# Altium PCB COMSXXXX_Comms_Board_Miniaturization.PcbDoc
Units mm, origin at the board's own origin, x right, y up, seen from the top; angles counter-clockwise.
Board outline 70 x 50 mm, 4 copper layers (Top, VCC, GND, Bottom); 55 components, 87 nets, 274 pads, 157 vias.
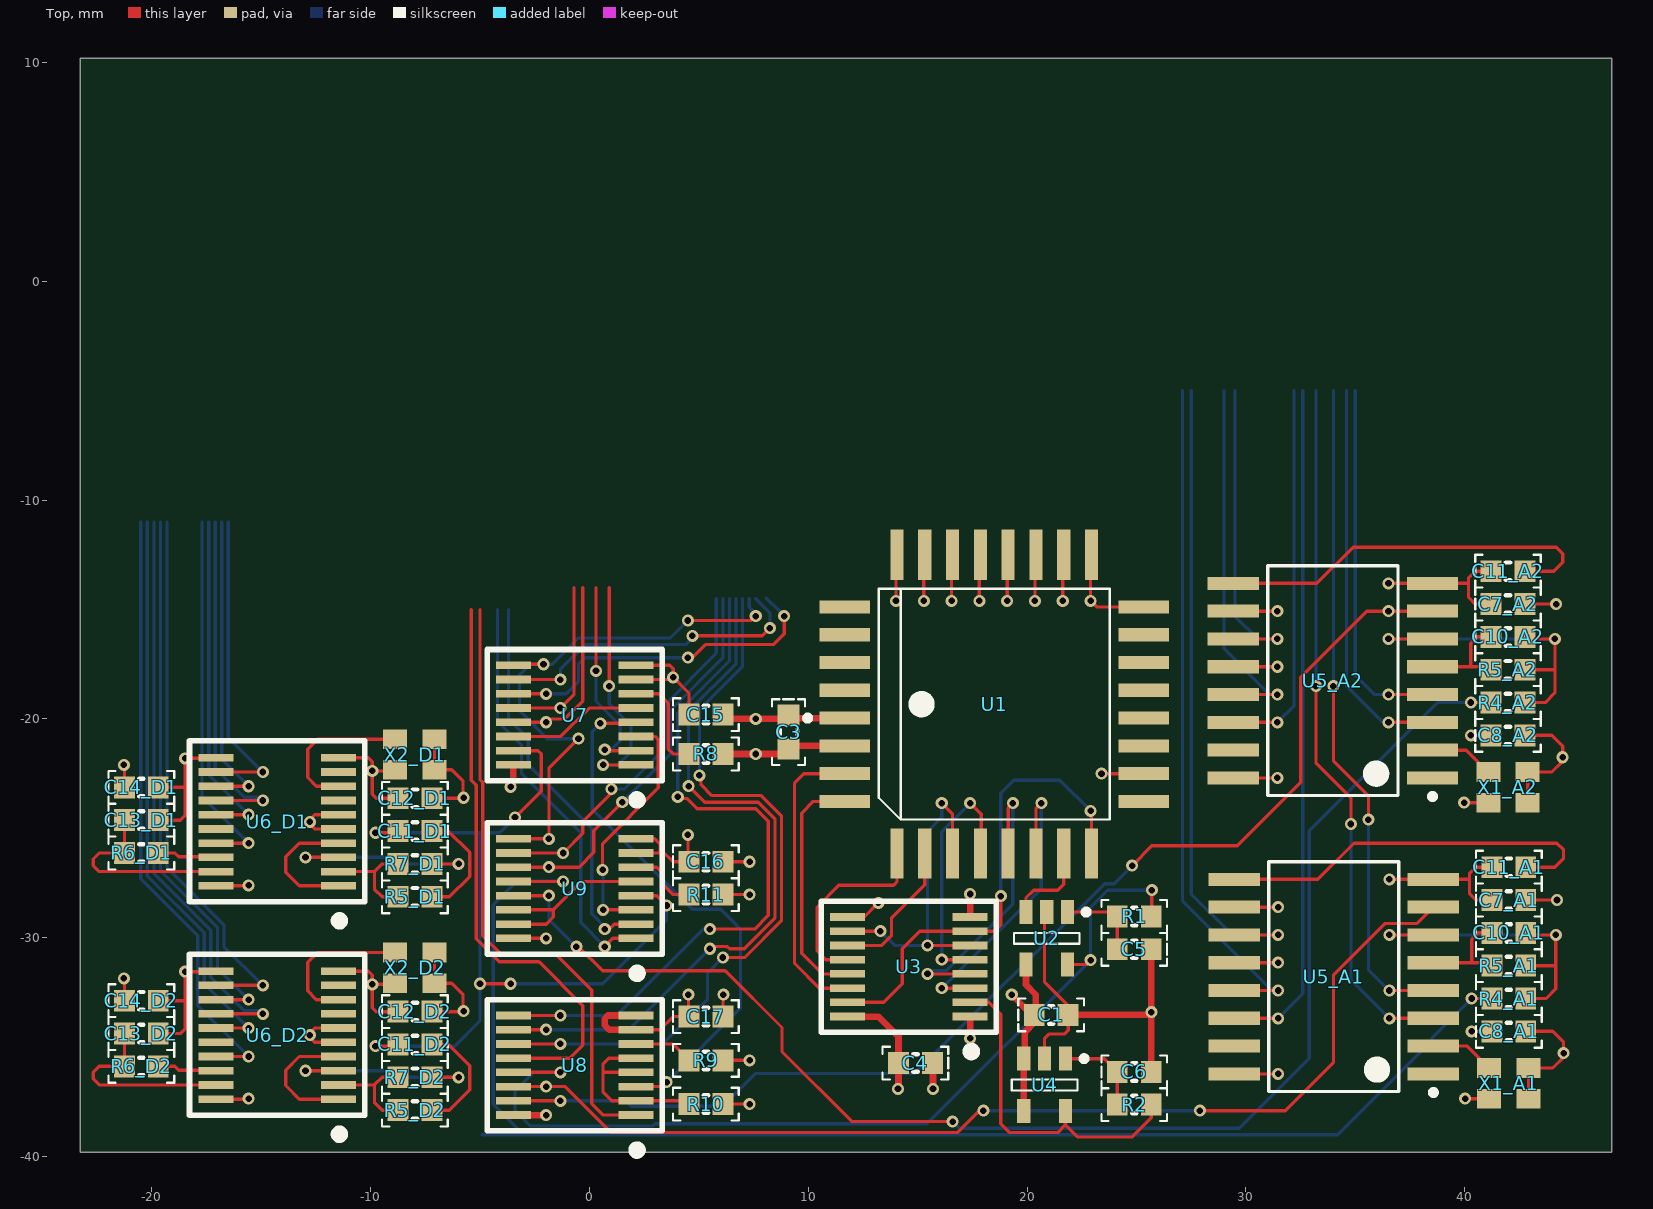
[diagram p0: Top view]
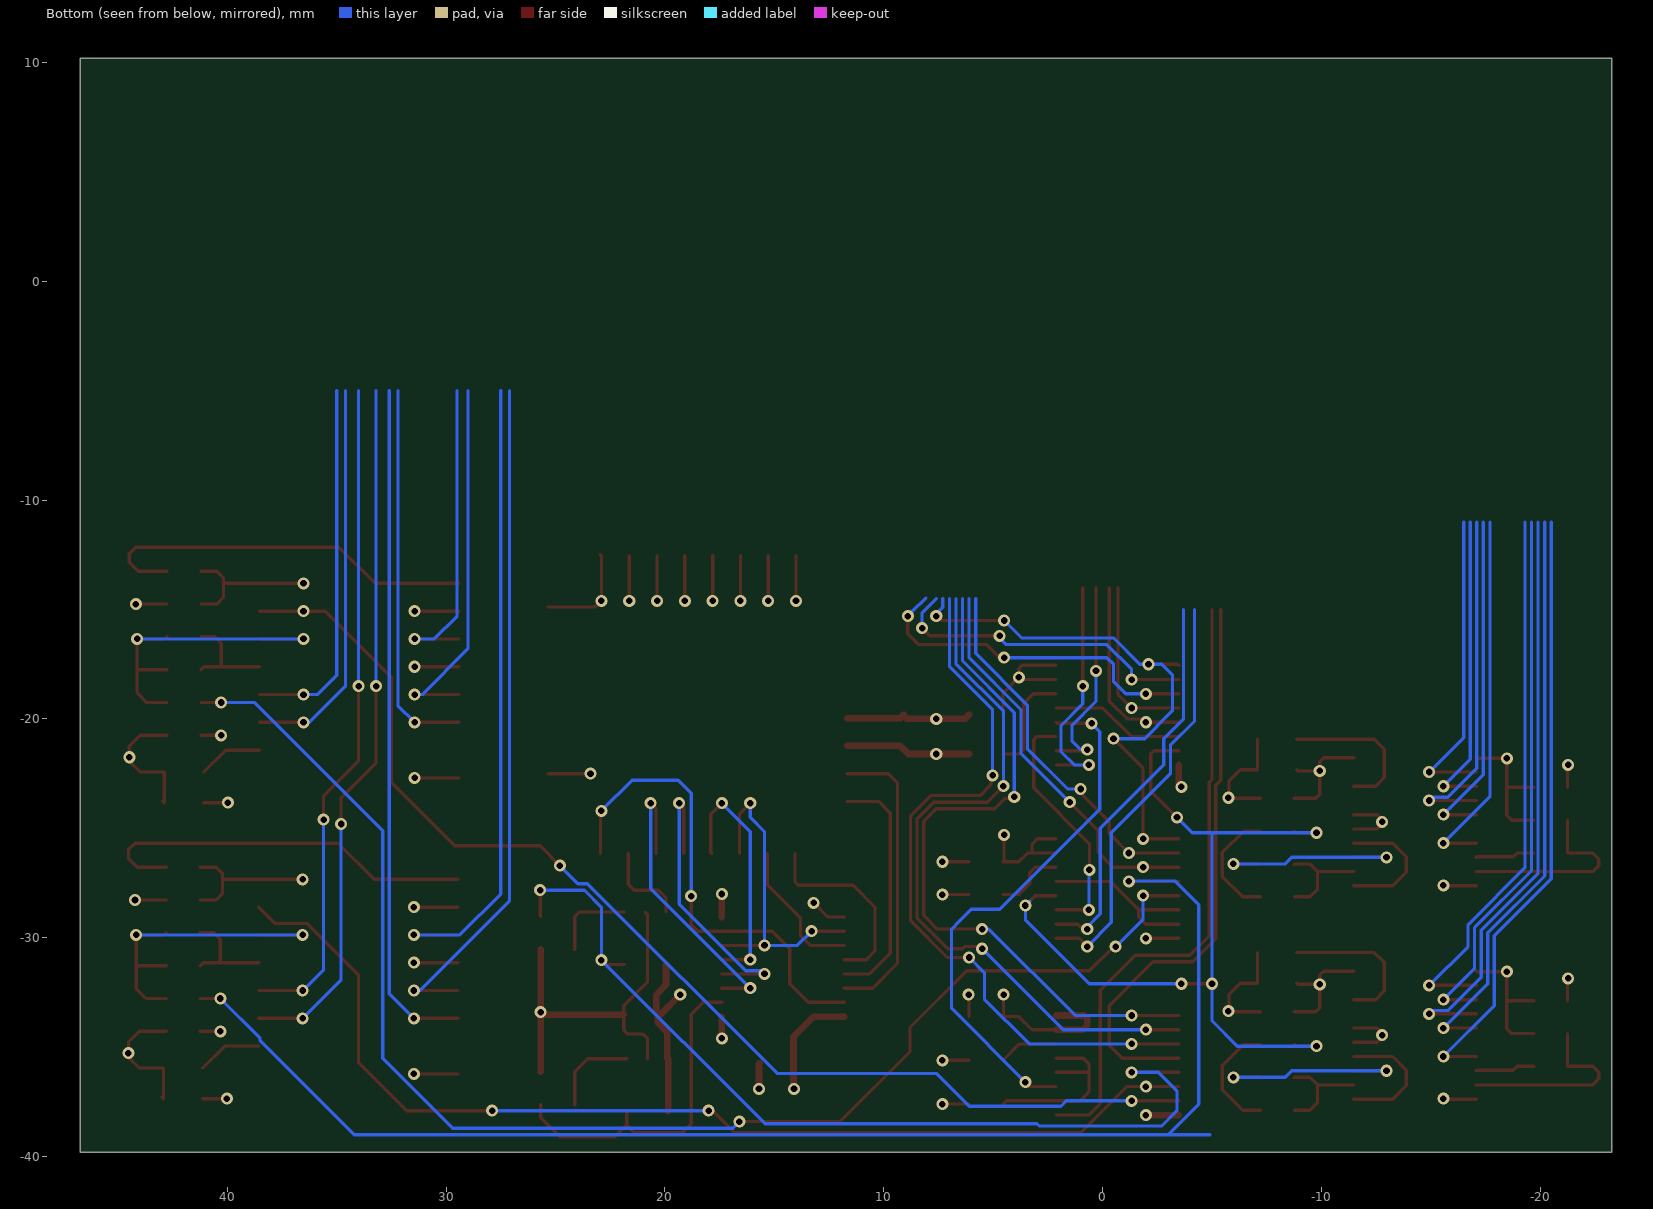
[diagram p1: Bottom view, seen from below]
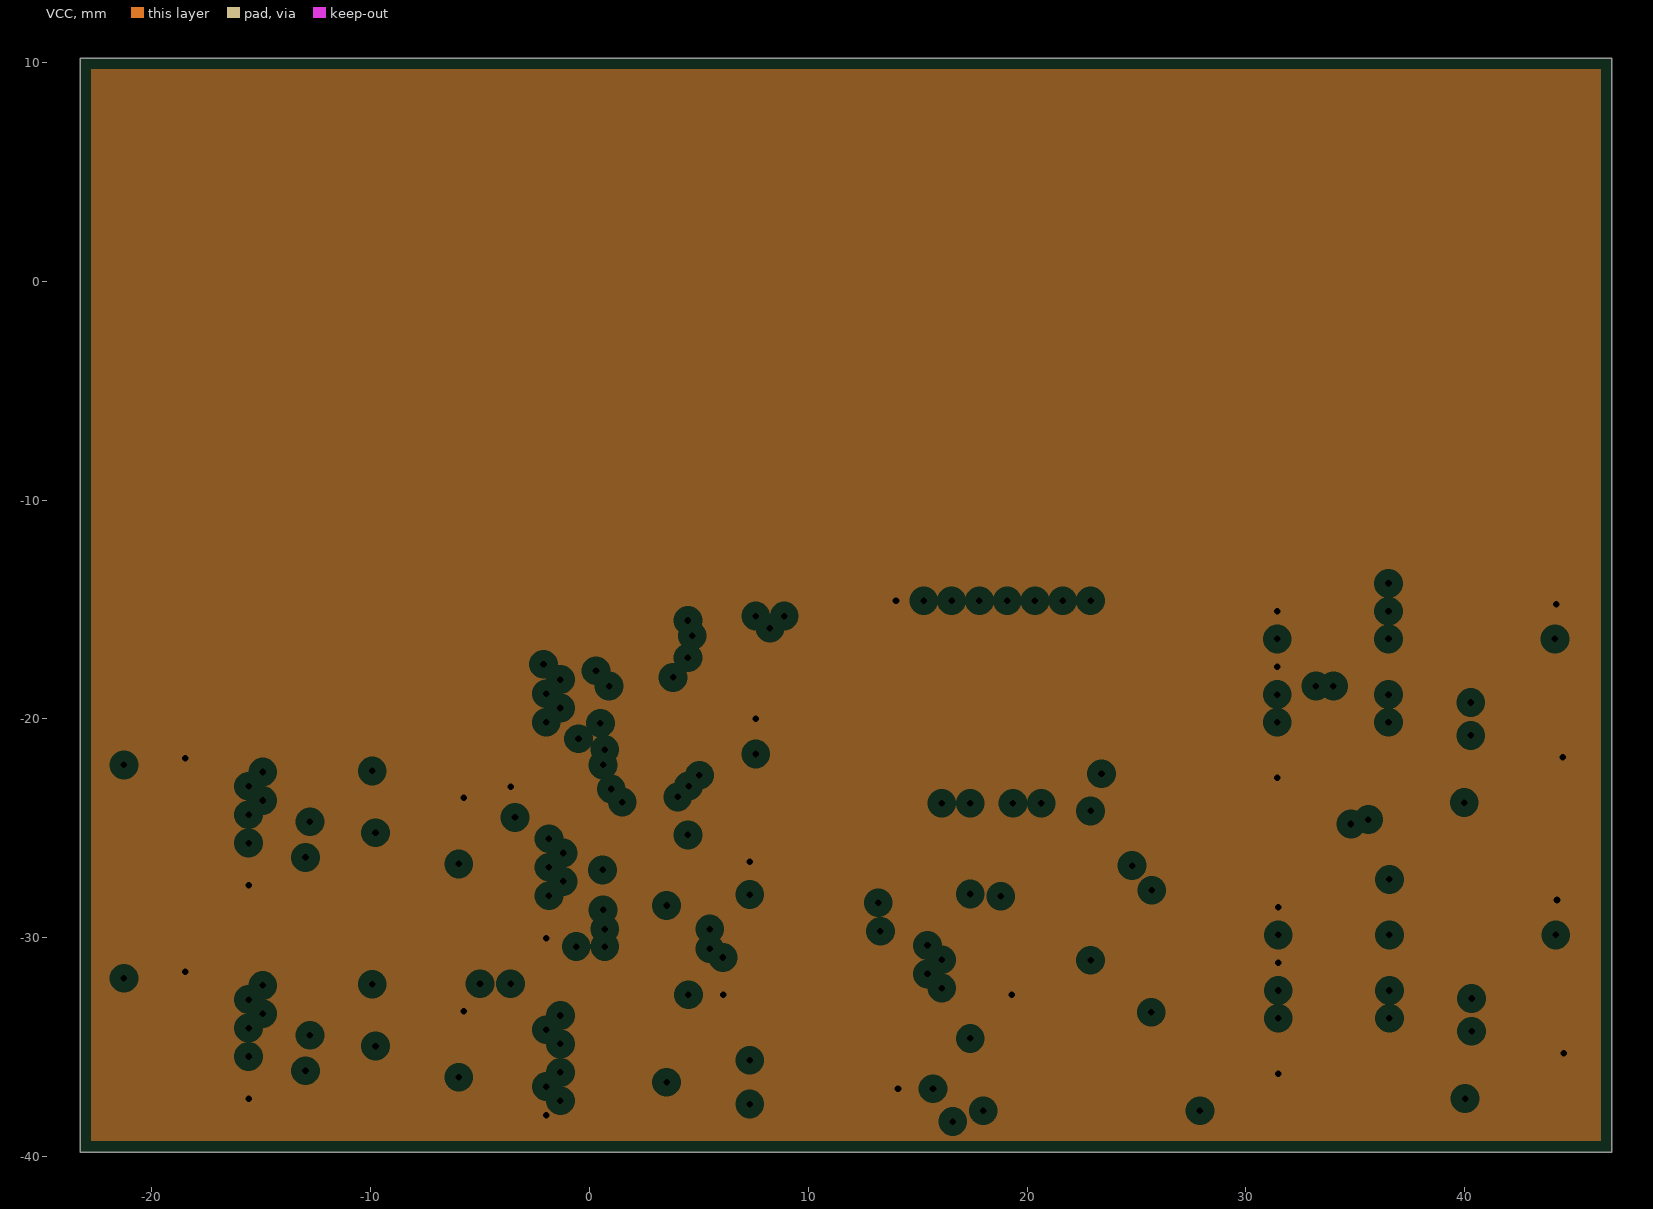
[diagram p2: VCC, clearances drawn from the general rule]
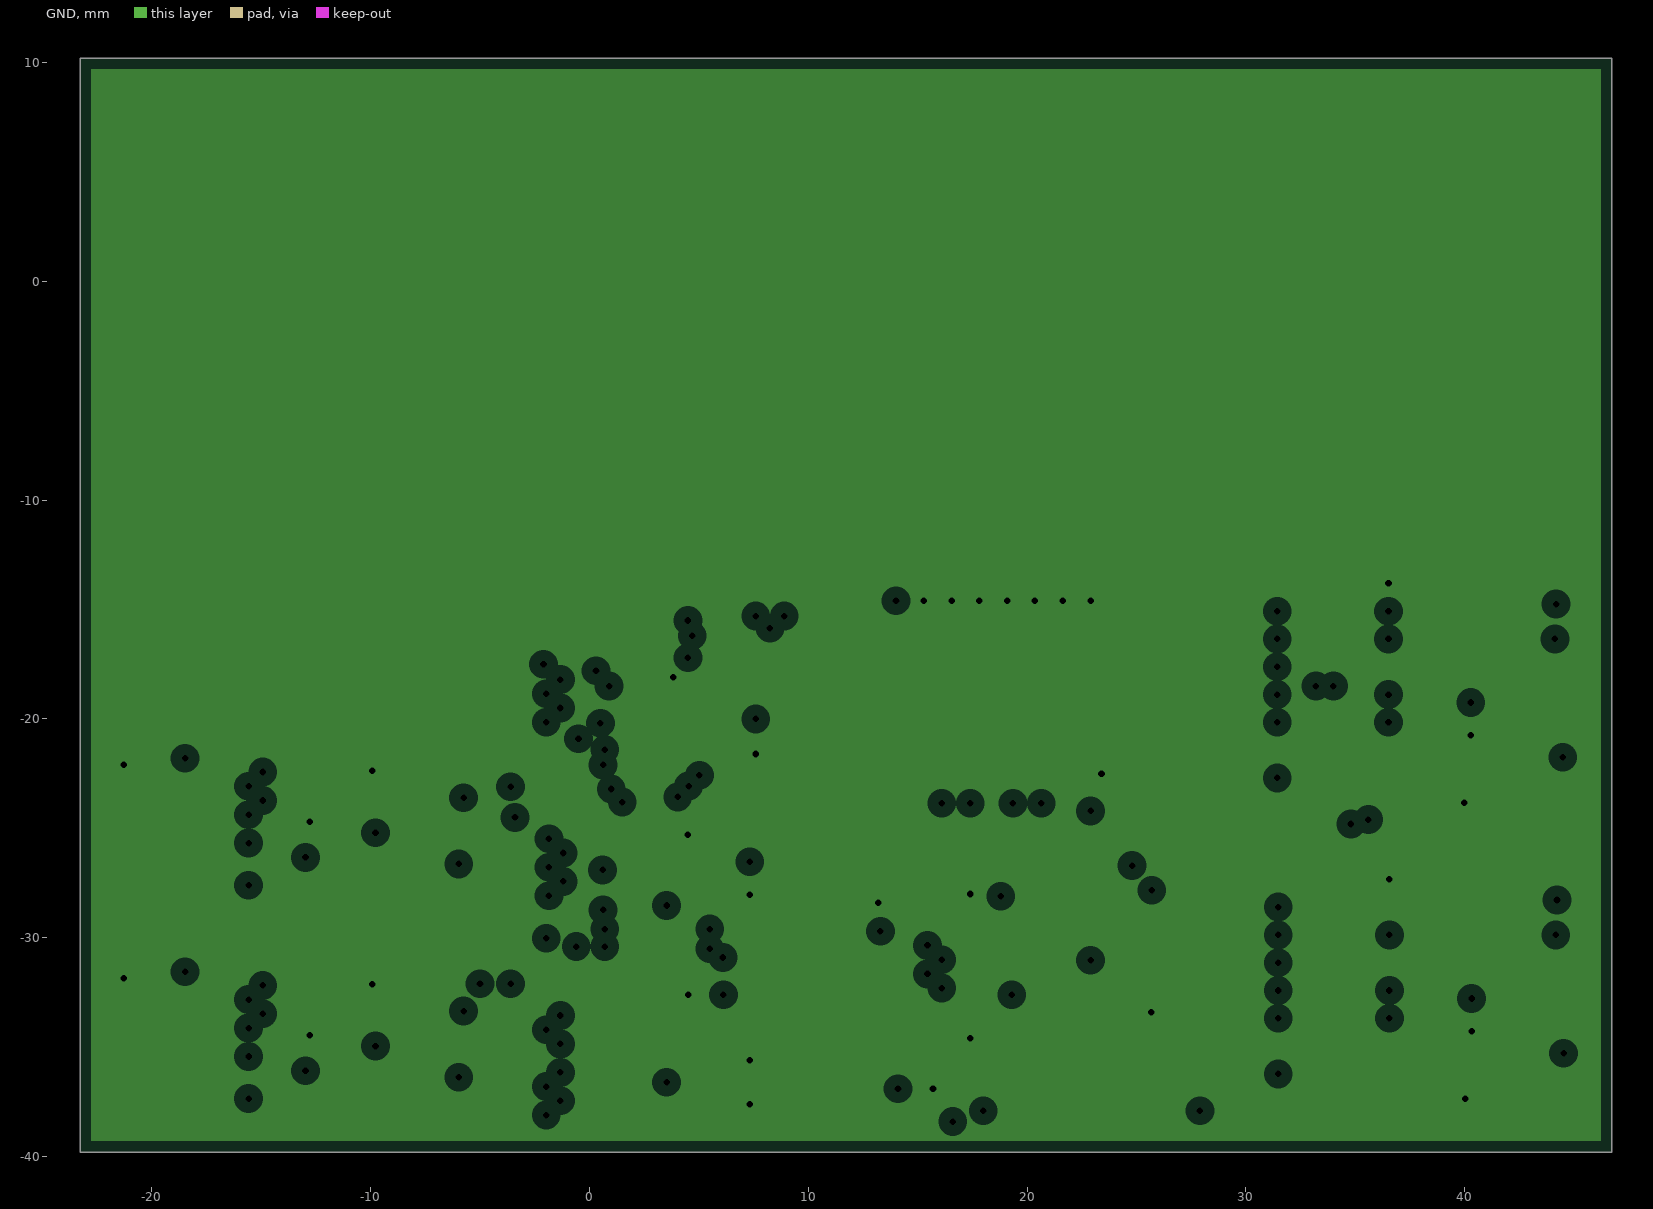
[diagram p3: GND, clearances drawn from the general rule]

## Layer stack, top to bottom
Top: signal copper 0.05
Dielectric: core 0.32, FR-4, Dk 4.8
VCC: plane copper 0.0356, net VCC
Dielectric: prepreg 0.32, FR-4, Dk 4.8
GND: plane copper 0.0356, net GND
Dielectric: core 0.32, FR-4, Dk 4.8
Bottom: signal copper 0.05

## Board outline
-23.275,-39.8 46.725,-39.8 46.725,10.2 -23.275,10.2

## Design rules (kind name [scope] priority, off if disabled: settings)
AcuteAngle [All] p1: minimum=4.50000000000000E+0001 checktracksonly=TRUE
Clearance [All] p1: gap=0.15
HoleSize [All] p1: absolutevalues=TRUE maxlimit=1 minlimit=0.25 maxpercent=80.000 minpercent=20.000
MinimumSolderMaskSliver [All] p1: minsoldermaskwidth=0.05
PasteMaskExpansion [All] p1: expansion=0.1
PlaneClearance [All] p1: clearance=0.508
PlaneConnect [All] p1: planeconnectstyle=Direct reliefexpansion=0.508 reliefentries=4 reliefconductorwidth=0.254 reliefairgap=0.254
PolygonConnect [All] p1: connectstyle=Direct reliefconductorwidth=0.254 reliefentries=4 polygonreliefangle="90 Angle"
RoutingVias [All] p1: holewidth=0.3 width=0.55 viastyle="Through Hole" minholewidth=0.3 minwidth=0.55 maxholewidth=0.7 maxwidth=1.2
SilkToSilkClearance [All] p1: silktosilkclearance=0
SilkscreenOverComponentPads [All] p1: minsilkscreentomaskgap=0.1
SolderMaskExpansion [All] p1: expansion=0.05
Width "Power Width" [InNet('VCC') OR InNet('GND')] p1: maxlimit=0.5 minlimit=0.15 preferedwidth=0.3
Width "Signal Width" [All] p2: maxlimit=0.5 minlimit=0.15 preferedwidth=0.15
21 further rules are at their usual default settings.

## Classes and differential pairs
component class A1: C7_A1 C8_A1 C9_A1 C10_A1 C11_A1 R3_A1 R4_A1 R5_A1 U5_A1 X1_A1
component class A2: C7_A2 C8_A2 C9_A2 C10_A2 C11_A2 R3_A2 R4_A2 R5_A2 U5_A2 X1_A2
component class Beacon: C1 C3 C4 C5 C6 R1 R2 U1 U2 U3 U4
component class D1: C11_D1 C12_D1 C13_D1 C14_D1 R5_D1 R6_D1 R7_D1 U6_D1 X2_D1
component class D2: C11_D2 C12_D2 C13_D2 C14_D2 R5_D2 R6_D2 R7_D2 U6_D2 X2_D2
component class U_ModemRXMux: C17 R11 U9
component class U_RadioMux: C15 R8 U7
component class U_TXDevMux: C16 R9 R10 U8
net class ADDRESS[7..0]: ADDRESS0 ADDRESS1 ADDRESS2 ADDRESS3 ADDRESS4 ADDRESS5 ADDRESS6 ADDRESS7
net class SWC[7..0]: SWC0 SWC1 SWC2 SWC3 SWC4 SWC5 SWC6 SWC7
channel class COMS0002_AFSK: A1 A2
channel class COMS0003_DTMF: D1 D2

## Components (designator, comment, footprint, x,y, rotation, side; value= is the part's Value field where it differs from the comment)
C1 "Capacitor, ceramic" CAP0603 21.1,-33.525 r0 top
C3 "Capacitor, ceramic" CAP0603 9.1,-20.6 r270 top
C4 "Capacitor, ceramic" CAP0603 14.9,-35.725 r180 top
C5 "Capacitor, ceramic" CAP0603 24.9,-30.525 r180 top
C6 "Capacitor, ceramic" CAP0603 24.9,-36.125 r0 top
C7_A1 "Capacitor, ceramic" CAP0603 42.015,-28.275 r0 top (schematic designator C7)
C7_A2 "Capacitor, ceramic" CAP0603 41.976,-14.749 r0 top (schematic designator C7)
C8_A1 "Capacitor, ceramic" CAP0603 42.015,-34.275 r0 top (schematic designator C8)
C8_A2 "Capacitor, ceramic" CAP0603 41.976,-20.749 r0 top (schematic designator C8)
C10_A1 "Capacitor, ceramic" CAP0603 42.015,-29.774 r0 top (schematic designator C10)
C10_A2 "Capacitor, ceramic" CAP0603 41.976,-16.249 r0 top (schematic designator C10)
C11_A1 "Capacitor, ceramic" CAP0603 42.015,-26.775 r0 top (schematic designator C11)
C11_A2 "Capacitor, ceramic" CAP0603 41.976,-13.249 r0 top (schematic designator C11)
C11_D1 "Capacitor, ceramic" CAP0603 -7.975,-25.125 r180 top (schematic designator C12)
C11_D2 "Capacitor, ceramic" CAP0603 -7.975,-34.875 r180 top (schematic designator C12)
C12_D1 "Capacitor, ceramic" CAP0603 -7.975,-23.625 r0 top (schematic designator C13)
C12_D2 "Capacitor, ceramic" CAP0603 -7.975,-33.375 r0 top (schematic designator C13)
C13_D1 "Capacitor, ceramic" CAP0603 -20.475,-24.625 r0 top (schematic designator C14)
C13_D2 "Capacitor, ceramic" CAP0603 -20.475,-34.375 r0 top (schematic designator C14)
C14_D1 "Capacitor, ceramic" CAP0603 -20.475,-23.125 r0 top (schematic designator C15)
C14_D2 "Capacitor, ceramic" CAP0603 -20.475,-32.875 r0 top (schematic designator C15)
C15 "Capacitor, ceramic" CAP0603 5.325,-19.8 r0 top (schematic designator C16)
C16 "Capacitor, ceramic" CAP0603 5.325,-26.525 r0 top (schematic designator C17)
C17 "Capacitor, ceramic" CAP0603 5.325,-33.6 r0 top (schematic designator C18)
R1 "Res1" RES0603 24.9,-29.025 r180 top
R2 "Res1" RES0603 24.9,-37.625 r0 top
R4_A1 "Res1" RES0603 42.015,-32.775 r0 top (schematic designator R4)
R4_A2 "Res1" RES0603 41.976,-19.249 r0 top (schematic designator R4)
R5_A1 "Res1" RES0603 42.015,-31.274 r0 top (schematic designator R5)
R5_A2 "Res1" RES0603 41.976,-17.749 r0 top (schematic designator R5)
R5_D1 "Res1" RES0603 -7.975,-28.125 r0 top (schematic designator R6)
R5_D2 "Res1" RES0603 -7.975,-37.875 r0 top (schematic designator R6)
R6_D1 "Res1" RES0603 -20.475,-26.125 r180 top (schematic designator R7)
R6_D2 "Res1" RES0603 -20.475,-35.875 r180 top (schematic designator R7)
R7_D1 "Res1" RES0603 -7.975,-26.625 r180 top (schematic designator R8)
R7_D2 "Res1" RES0603 -7.975,-36.375 r180 top (schematic designator R8)
R8 "Res1" RES0603 5.325,-21.6 r0 top (schematic designator R9)
R9 "Res1" RES0603 5.325,-35.6 r180 top (schematic designator R10)
R10 "Res1" RES0603 5.325,-37.6 r180 top (schematic designator R11)
R11 "Res1" RES0603 5.325,-28.025 r180 top (schematic designator R12)
U1 "AT27LV256" PLCC32 18.5,-19.325 r90 top
U2 "IttyBitty Timer" SOT23-5 20.9,-30.025 r270 top
U3 "CD4520BPW" TSSOP16 14.6,-31.325 r90 top
U4 "IttyBitty Timer" SOT23-5 20.8,-36.725 r270 top
U5_A1 "MX614DW" SOIC16 34.015,-31.775 r180 top (schematic designator U5)
U5_A2 "MX614DW" SOIC16 33.976,-18.249 r180 top (schematic designator U5)
U6_D1 "MT88L70AN" TSSOP20 -11.475,-27.625 r90 top (schematic designator U6)
U6_D2 "MT88L70AN" TSSOP20 -11.475,-37.375 r90 top (schematic designator U6)
U7 "CD4053BCM" TSSOP16 -0.675,-19.825 r90 top
U8 "CD4051BCM" TSSOP16 -0.675,-35.825 r90 top
U9 "CD4053BCM" TSSOP16 -0.675,-27.75 r90 top
X1_A1 "ECS-2025-035" ECS-2025 42.015,-36.649 r180 top (schematic designator X1)
X1_A2 "ECS-2025-035" ECS-2025 41.976,-23.124 r180 top (schematic designator X1)
X2_D1 "ECS-2025-035" ECS-2025 -7.975,-21.625 r180 top (schematic designator X2)
X2_D2 "ECS-2025-035" ECS-2025 -7.975,-31.375 r180 top (schematic designator X2)

## Footprints (in the part's own frame and the unit in brackets; to place one, negate y for a bottom-side part, rotate by r counter-clockwise, add the part's x,y. Pads: shape width x height; smd on the part's side, far side on the other; paste and mask are expansions set on the pad)
CAP0603 [mm] "0603 Capacitor, Medium Density"
  rect 0.95x1 smd: 1(-0.775,0) 2(0.775,0)
  silkscreen extent -1.5,-0.75 1.5,0.75, body extent -0.8,-0.48 0.8,0.47, height 0.55
ECS-2025 [mm] "SMD Clock Oscillator"
  rect 1.1x0.9 smd: 1(-0.9,0.7) 2(0.9,0.7) 3(0.9,-0.7) 4(-0.9,-0.7)
PLCC32 [mm] "PLCC, 32-Leads, Body 15.1x15.1mm (max), Pitch 1.270mm, IPC Medium Density"
  rect 0.6x2.3 smd: 1(-0.635,6.825) 2(-1.905,6.825) 3(-3.175,6.825) 4(-4.445,6.825) 13(-4.445,-6.825) 14(-3.175,-6.825) 15(-1.905,-6.825) 16(-0.635,-6.825) 17(0.635,-6.825) 18(1.905,-6.825) 19(3.175,-6.825) 20(4.445,-6.825) 29(4.445,6.825) 30(3.175,6.825) 31(1.905,6.825) 32(0.635,6.825)
  rect 2.3x0.6 smd: 5(-6.825,4.445) 6(-6.825,3.175) 7(-6.825,1.905) 8(-6.825,0.635) 9(-6.825,-0.635) 10(-6.825,-1.905) 11(-6.825,-3.175) 12(-6.825,-4.445) 21(6.825,-4.445) 22(6.825,-3.175) 23(6.825,-1.905) 24(6.825,-0.635) 25(6.825,0.635) 26(6.825,1.905) 27(6.825,3.175) 28(6.825,4.445)
  silkscreen extent -5.27,-5.28 5.28,8.65, body extent -7.02,-7.02 7.02,7.02, height 3.56
RES0603 [mm] "0603 Resistor, Medium Density"
  rect 0.95x1 smd: 1(-0.775,0) 2(0.775,0)
  silkscreen extent -1.5,-0.75 1.5,0.75, body extent -0.8,-0.48 0.8,0.47, height 0.55
SOIC16 [mm] "SOIC, 16-Leads, Body 10.5x7.6mm (max), Pitch 1.27mm, IPC Medium Density"
  rect 2.35x0.6 smd: 1(-4.55,4.445) 2(-4.55,3.175) 3(-4.55,1.905) 4(-4.55,0.635) 5(-4.55,-0.635) 6(-4.55,-1.905) 7(-4.55,-3.175) 8(-4.55,-4.445) 9(4.55,-4.445) 10(4.55,-3.175) 11(4.55,-1.905) 12(4.55,-0.635) 13(4.55,0.635) 14(4.55,1.905) 15(4.55,3.175) 16(4.55,4.445)
  silkscreen extent -4.68,-5.25 2.97,5.42, body extent -3.8,-5.24 3.79,5.25, height 2.67
SOT23-5 [mm] "SOT23, 5-Leads, Body 3.0x3.0mm (max), Pitch 0.95mm, IPC Medium Density"
  rect 1.1x0.6 smd: 1(-1.2,0.95) 2(-1.2,0) 3(-1.2,-0.95) 4(1.2,-0.95) 5(1.2,0.95)
  silkscreen extent -1.32,-1.5 0.25,1.93, body extent -0.85,-1.5 0.85,1.5, height 1.45
TSSOP16 [mm] "Thin Small Outline Package"
  rect 0.35x1.6 smd: 1(-2.275,-2.8) 2(-1.625,-2.8) 3(-0.975,-2.8) 4(-0.325,-2.8) 5(0.325,-2.8) 6(0.975,-2.8) 7(1.625,-2.8) 8(2.275,-2.8) 9(2.275,2.8) 10(1.625,2.8) 11(0.975,2.8) 12(0.325,2.8) 13(-0.325,2.8) 14(-0.975,2.8) 15(-1.625,2.8) 16(-2.275,2.8)
  silkscreen extent -4.07,-4 3,4, body extent -2.55,-2.25 2.55,2.25, height 1.2
TSSOP20 [mm] "Thin Small Outline Package"
  rect 0.35x1.6 smd: 1(0,0) 2(0.65,0) 3(1.3,0) 4(1.95,0) 5(2.6,0) 6(3.25,0) 7(3.9,0) 8(4.55,0) 9(5.2,0) 10(5.85,0) 11(5.85,5.6) 12(5.2,5.6) 13(4.55,5.6) 14(3.9,5.6) 15(3.25,5.6) 16(2.6,5.6) 17(1.95,5.6) 18(1.3,5.6) 19(0.65,5.6) 20(0,5.6)
  silkscreen extent -1.8,-1.2 6.63,6.8, body extent -0.27,0.55 6.17,5.05, height 1.2

## Part data
C1 C3 C4 C5 C6 C7_A1 C7_A2 C8_A1 C8_A2 C10_A1 C10_A2 C11_A1 C11_A2 C11_D1 C11_D2 C12_D1 C12_D2 C13_D1 C13_D2 C14_D1 C14_D2 C15 C16 C17: library part CAP0603, "Capacitor"
R1 R2 R4_A1 R4_A2 R5_A1 R5_A2 R5_D1 R5_D2 R6_D1 R6_D2 R7_D1 R7_D2 R8 R9 R10 R11: library part RES0603, "Resistor"
U1: "256 Kbit (32Kb X 8) UV EPROM and OTP EPROM"
U2 U4: library part MIC1557, "Miniature Astable Timer Chip"
U3: "Dual Binary Up-Counter"
U5_A1 U5_A2: "Bell 202 Compatible Modem, SOIC"
U6_D1 U6_D2: "3 Volt Integrated DTMF Receiver"
U7 U9: "Triple 2-Channnel Analog Multiplexer/Demutiplexer"
U8: "8-Channel Analog Multiplexer/Demultiplexer"
X1_A1 X1_A2 X2_D1 X2_D2: "SMD Clock Oscillator, 3.579545MHz"

## Via types
v1: diameter 0.55, hole 0.3, Top to Bottom, 157 vias

## Nets (pads, with @x,y where several pads share a name; then routed paths per layer and width w, separated by ;. In a path a pad name is that pad's centre, name@x,y a point inside that pad or via, vN(x,y) a via of type N, cw(c..) or ccw(c..) an arc to the next point about the centre after c; other vN are vias at no path point)
ADDRESS0: U1.10 U3.3 | length 14
  Top w0.15: v1(16.1,-32.3) U3.3 ; U1.10 20.405,-24.095 v1(20.65,-23.85)
  Bottom w0.15: v1(16.1,-32.3) 20.65,-27.75 v1(20.65,-23.85)
ADDRESS1: U1.9 U3.4 | length 14.2
  Top w0.15: v1(15.45,-31.65) U3.4 ; U1.9 19.135,-24.065 v1(19.35,-23.85)
  Bottom w0.15: v1(15.45,-31.65) 15.6,-31.5 16.307,-31.5 19.35,-28.457 v1(19.35,-23.85)
ADDRESS2: U1.8 U3.5 | length 11.5
  Top w0.15: v1(16.1,-31) U3.5 ; v1(17.4,-23.85) 17.9,-24.35 17.9,-26.115 U1.8
  Bottom w0.15: v1(16.1,-31) 16.1,-25.15 v1(17.4,-23.85)
ADDRESS3: U1.7 U3.6 U3.10 | length 15.1
  Top w0.15: U3.10 v1(13.3,-29.7) ; v1(15.45,-30.35) U3.6 ; v1(16.1,-23.85) 16.595,-24.345 U1.7
  Bottom w0.15: v1(13.3,-29.7) 13.95,-30.35 v1(15.45,-30.35) 15.45,-25.15 16.1,-24.5 v1(16.1,-23.85)
ADDRESS4: U1.6 U3.11 | length 6.6
  Top w0.15: U3.11 13.357,-30.35 13.8,-29.907 13.8,-29.1 15.325,-27.575 U1.6
ADDRESS5: U1.5 U3.12 | length 9
  Top w0.15: U3.12 10.8,-31 10.4,-30.6 10.4,-28.6 11.4,-27.6 13.9,-27.6 14.055,-27.445 U1.5
ADDRESS6: U1.4 U3.13 | length 11.1
  Top w0.15: U1.4 10.23,-23.77 9.7,-24.3 9.7,-30.7 10.65,-31.65 U3.13
ADDRESS7: U1.3 U3.14 | length 13.6
  Top w0.15: U1.3 9.8,-22.5 9.375,-22.925 9.375,-31.175 10.5,-32.3 U3.14
AFSK1_DET: U5_A1.14 | length 31.2
  Top w0.15: U5_A1.14 v1(31.475,-33.68)
  Bottom w0.15: v1(31.475,-33.68) 32.6,-32.554 32.6,-5
AFSK1_M0: U5_A1.3 | length 32.1
  Top w0.15: v1(33.2,-18.5) 33.2,-22 34.8,-23.6 v1(34.8,-24.8) ; v1(36.555,-33.68) U5_A1.3
  Bottom w0.15: v1(33.2,-18.5) 33.2,-5 ; v1(34.8,-24.8) 34.8,-31.925 v1(36.555,-33.68)
AFSK1_M1: U5_A1.4 | length 30.5
  Top w0.15: v1(34,-18.5) 34,-21.9 35.6,-23.5 v1(35.6,-24.6) ; v1(36.555,-32.41) U5_A1.4
  Bottom w0.15: v1(34,-18.5) 34,-5 ; v1(35.6,-24.6) 35.6,-31.455 v1(36.555,-32.41)
AFSK1_RX: R4_A1.1 U9.12 | length 65.8
  Top w0.15: U9.12 v1(-1.2,-27.425) ; v1(40.315,-32.775) R4_A1.1
  Bottom w0.15: -4.9,-39 -3,-39 ; v1(-1.2,-27.425) -1.225,-27.4 -3.3,-27.4 -4.4,-28.5 -4.4,-37.6 -3,-39 ; v1(40.315,-32.775) 38.5,-34.589 38.5,-34.7 34.2,-39 -3,-39
AFSK1_RXD: U5_A1.13 | length 31.4
  Top w0.15: U5_A1.13 v1(31.475,-32.41)
  Bottom w0.15: 27.1,-5 27.1,-28.3 31.21,-32.41 v1(31.475,-32.41)
AFSK1_TX: U5_A1.7 U8.14 | length 49.5
  Top w0.15: U8.14 v1(-1.975,-36.8) -1.099,-36.8 1.001,-38.9 16.807,-38.9 17.807,-37.9 v1(18,-37.9) ; v1(27.9,-37.9) 31.8,-37.9 34,-35.7 34,-31.717 36.373,-29.345 37.82,-29.345 U5_A1.7
  Bottom w0.15: v1(18,-37.9) v1(27.9,-37.9)
AFSK1_TXD: U5_A1.11 | length 29.8
  Top w0.15: U5_A1.11 v1(31.475,-29.87)
  Bottom w0.15: 27.5,-5 27.5,-28 29.37,-29.87 v1(31.475,-29.87)
AFSK2_DET: U5_A2.14 | length 17.5
  Top w0.15: U5_A2.14 v1(31.436,-20.154)
  Bottom w0.15: v1(31.436,-20.154) 32.2,-19.39 32.2,-5
AFSK2_M0: U5_A2.3 | length 18.1
  Top w0.15: v1(36.516,-20.154) U5_A2.3
  Bottom w0.15: 34.6,-5 34.6,-18.5 36.254,-20.154 v1(36.516,-20.154)
AFSK2_M1: U5_A2.4 | length 16.9
  Top w0.15: v1(36.516,-18.884) U5_A2.4
  Bottom w0.15: 35,-5 35,-18 35.884,-18.884 v1(36.516,-18.884)
AFSK2_RX: R4_A2.1 U9.13 | length 64.5
  Top w0.15: U9.13 v1(-1.85,-28.075) ; v1(-0.6,-30.4) -0.5,-30.4 0.6,-31.5 6.2,-31.5 8.8,-34.1 8.8,-35.2 12,-38.4 v1(16.6,-38.4) ; v1(40.276,-19.249) R4_A2.1
  Bottom w0.15: v1(-1.85,-28.075) -1.85,-29.15 v1(-0.6,-30.4) ; v1(16.6,-38.4) 16.9,-38.7 29.701,-38.7 32.9,-35.501 32.9,-25.1 38.751,-19.249 v1(40.276,-19.249)
AFSK2_RXD: U5_A2.13 | length 17.1
  Top w0.15: U5_A2.13 v1(31.436,-18.884)
  Bottom w0.15: 29,-5 29,-16.8 31.084,-18.884 v1(31.436,-18.884)
AFSK2_TX: U5_A2.7 U8.15 | length 54.3
  Top w0.15: U8.15 v1(-1.325,-37.45) ; v1(24.8,-26.7) 25.7,-25.8 29.6,-25.8 32.5,-22.9 32.5,-18.1 35.526,-15.074 v1(36.516,-15.074) U5_A2.7
  Bottom w0.15: v1(-1.325,-37.45) 1.65,-37.45 1.9,-37.7 6.1,-37.7 7.6,-36.2 14.876,-36.2 23.551,-27.525 23.975,-27.525 v1(24.8,-26.7)
AFSK2_TXD: U5_A2.11 | length 14.7
  Top w0.15: U5_A2.11 v1(31.436,-16.344)
  Bottom w0.15: 29.5,-5 29.5,-15.3 30.544,-16.344 v1(31.436,-16.344)
BCN: R1.1 U2.5 U8.13 | length 43.2
  Top w0.15: U8.13 v1(-1.325,-36.15) ; U2.5 22.7,-31.225 v1(22.9,-31.025) ; R1.1 25.7,-29 v1(25.7,-27.825)
  Bottom w0.15: v1@-1.275,-36.2 v1(-1.325,-36.15) -2.55,-36.15 -3.4,-37 -3.4,-37.9 -2.7,-38.6 2.9,-38.6 3,-38.5 15.425,-38.5 v1(22.9,-31.025) 22.9,-28.6 23.675,-27.825 v1(25.7,-27.825)
COUNTER_CLK: R2.2 U3.2 U4.5 | length 15.6
  Top w0.15: U3.2 18.25,-32.95 18.8,-33.5 18.8,-38.5 19.2,-38.9 21.4,-38.9 21.75,-38.55 ; U4.5 21.75,-38.55 ; R2.2 25.675,-38.225 24.8,-39.1 22.3,-39.1 21.75,-38.55
DTMF1_Q1: U6_D1.12 | length 14.2
  Top w0.15: U6_D1.12 v1(-14.925,-22.425)
  Bottom w0.15: -16.5,-11 -16.5,-20.85 v1(-14.925,-22.425)
DTMF1_Q2: U6_D1.13 | length 14.1
  Top w0.15: U6_D1.13 v1(-15.575,-23.075)
  Bottom w0.15: -16.8,-11 -16.8,-21.85 v1(-15.575,-23.075)
DTMF1_Q3: U6_D1.14 | length 16.2
  Top w0.15: U6_D1.14 v1(-14.925,-23.725)
  Bottom w0.15: -17.1,-11 -17.1,-22.257 -15.782,-23.575 -15.075,-23.575 v1(-14.925,-23.725)
DTMF1_Q4: U6_D1.15 | length 15.6
  Top w0.15: U6_D1.15 v1(-15.575,-24.375)
  Bottom w0.15: -17.4,-11 -17.4,-22.55 v1(-15.575,-24.375)
DTMF1_STD: U6_D1.17 | length 17.1
  Top w0.15: U6_D1.17 v1(-15.575,-25.675)
  Bottom w0.15: -17.7,-11 -17.7,-23.55 v1(-15.575,-25.675)
DTMF2_Q1: U6_D2.12 | length 25.1
  Top w0.15: U6_D2.12 v1(-14.925,-32.175)
  Bottom w0.15: -19.3,-11 -19.3,-26.803 -16.7,-29.403 -16.7,-30.4 v1(-14.925,-32.175)
DTMF2_Q2: U6_D2.13 | length 25
  Top w0.15: U6_D2.13 v1(-15.575,-32.825)
  Bottom w0.15: -19.6,-11 -19.6,-26.927 -17,-29.527 -17,-31.4 v1(-15.575,-32.825)
DTMF2_Q3: U6_D2.14 | length 27.1
  Top w0.15: U6_D2.14 v1(-14.925,-33.475)
  Bottom w0.15: -19.9,-11 -19.9,-27.051 -17.3,-29.651 -17.3,-31.807 -15.782,-33.325 -15.075,-33.325 v1(-14.925,-33.475)
DTMF2_Q4: U6_D2.15 | length 26.5
  Top w0.15: U6_D2.15 v1(-15.575,-34.125)
  Bottom w0.15: -20.2,-11 -20.2,-27.176 -17.6,-29.776 -17.6,-32.1 v1(-15.575,-34.125)
DTMF2_STD: U6_D2.17 | length 28
  Top w0.15: U6_D2.17 v1(-15.575,-35.425)
  Bottom w0.15: -20.5,-11 -20.5,-27.3 -17.9,-29.9 -17.9,-33.1 v1(-15.575,-35.425)
DTMF_RX: C11_D1.2 C11_D2.2 U7.15 U9.4 | length 39.6
  Top w0.15: v1(-9.775,-34.95) -8.825,-34.95 C11_D2.2 ; v1(-9.775,-25.2) -8.825,-25.2 C11_D1.2 ; v1(-5,-32.1) v1(-3.6,-32.1) ; U7.15 -2.35,-21.45 -2.2,-21.6 -2.2,-23.3 v1(-3.4,-24.5) ; U9.4 3.075,-28.075 v1(3.525,-28.525)
  Bottom w0.15: v1(-9.775,-34.95) -6.15,-34.95 -5,-33.8 v1(-5,-32.1) -5,-25.2 ; v1(-9.775,-25.2) -5,-25.2 ; v1(-3.6,-32.1) 0.6,-32.1 3.525,-29.175 v1(3.525,-28.525) 3.325,-28.325 ; v1(-3.4,-24.5) -4.1,-25.2 -5,-25.2
GMSK1_RX: U9.2 | length 17.9
  Top w0.15: v1(0.7,-29.6) 0.9,-29.6 1.125,-29.375 U9.2
  Bottom w0.15: -3.7,-15 -3.7,-20 -2.793,-20.907 -2.793,-22.1 0.1,-24.993 0.1,-26.1 0.1,-26.593 0.1,-28.907 0.7,-29.507 v1(0.7,-29.6)
GMSK1_TX: U8.12 | length 26.5
  Top w0.15: -5.4,-15 -5.4,-22.801 -5.175,-23.026 -5.175,-30.042 -4.117,-31.1 -2.3,-31.1 -0.3,-33.1 -0.3,-34.9 -0.9,-35.5 U8.12
GMSK2_RX: U9.1 | length 19
  Top w0.15: v1(0.7,-30.4) 1.075,-30.025 U9.1
  Bottom w0.15: -4.2,-15 -4.2,-20.1 -3.1,-21.2 -3.1,-22.5 -0.4,-25.2 -0.4,-29.3 v1(0.7,-30.4)
GMSK2_TX: U8.1 | length 28.4
  Top w0.15: -5,-15 -5,-22.776 -4.875,-22.901 -4.875,-29.918 -3.993,-30.8 -1.5,-30.8 0.1,-32.4 0.1,-37.575 0.625,-38.1 U8.1
GND: C1.2 C3.2 C4.1 C5.1 C6.2 C7_A1.1 C7_A2.1 C8_A1.1 C8_A2.1 C11_A1.1 C11_A2.1 C12_D1.1 C12_D2.1 C14_D1.1 C14_D2.1 C15.1 C16.1 C17.1 R8.2 R9.1 R10.1 R11.1 U1.2 U1.14 U1.20 U1.21 U1.22 U1.23 U1.24 U1.25 U1.26 U1.27 U2.2 U3.1 U3.8 U3.9 U4.2 U5_A1.8 U5_A2.8 U6_D1.5 U6_D1.6 U6_D1.10 U6_D2.5 U6_D2.6 U6_D2.10 U7.7 U7.8 U8.7 U8.8 U9.7 U9.8 X1_A1.2 X1_A2.2 X2_D1.2 X2_D2.2 | length 105.8
  Top w0.15: v1(-21.275,-31.85) -21.25,-31.875 C14_D2.1 ; v1(-21.275,-22.1) -21.25,-22.125 C14_D1.1 ; U6_D2.5 -12.55,-34.775 -12.775,-34.55 -12.775,-34.35 -12.55,-34.125 U6_D2.6 ; U6_D2.10 -10.1,-31.525 -9.925,-31.7 v1(-9.925,-32.125) ; U6_D1.5 -12.55,-25.025 -12.775,-24.8 -12.775,-24.6 -12.55,-24.375 U6_D1.6 ; U6_D1.10 -10.1,-21.775 -9.925,-21.95 v1(-9.925,-22.375) ; X2_D2.2 -8.925,-32.125 v1(-9.925,-32.125) ; X2_D1.2 -8.925,-22.375 v1(-9.925,-22.375) ; C12_D2.1 -9.75,-33.375 -9.925,-33.2 v1(-9.925,-32.125) ; C12_D1.1 -9.75,-23.625 -9.925,-23.45 v1(-9.925,-22.375) ; U8.7 3.225,-34.2 3.825,-33.6 C17.1 4.525,-33.575 v1(4.525,-32.6) ; U9.7 3.225,-26.125 ; U9.8 2.975,-25.475 3.225,-25.725 3.225,-26.125 ; U7.7 3.725,-18.2 v1(3.825,-18.1) ; U7.8 3.675,-17.55 3.825,-17.7 v1(3.825,-18.1) ; v1(4.5,-25.3) 4.5,-26.475 C16.1 3.825,-26.525 3.425,-26.125 3.225,-26.125 ; C15.1 4.55,-18.825 v1(3.825,-18.1) ; R10.1 v1(7.325,-37.6) ; R9.1 v1(7.325,-35.6) ; R11.1 v1(7.325,-28.025) ; U3.9 12.55,-29.05 v1(13.2,-28.4) ; v1(15.28,-14.6) U1.27@15.28,-12.545 ; v1(16.55,-14.6) U1.26@16.55,-12.545 ; v1(17.82,-14.6) U1.25@17.82,-12.545 ; v1(19.09,-14.6) U1.24@19.09,-12.545 ; v1(20.36,-14.6) U1.23@20.36,-12.545 ; U4.2 20.8,-34.6 21,-34.4 21.7,-34.4 21.875,-34.225 C1.2 21.875,-33.1 20.8,-32.025 20.8,-28.925 U2.2 ; v1(21.63,-14.6) U1.22@21.63,-12.545 ; U1.21 22.9,-12.545 v1(22.9,-14.6) 23.18,-14.88 U1.20 ; v1(23.4,-22.5) U1.14 ; v1(36.516,-13.804) U5_A2.8 40.131,-13.804 40.176,-13.849 ; v1(36.555,-27.33) U5_A1.8 40.17,-27.33 40.215,-27.374 ; v1(39.976,-23.824) X1_A2.2 ; v1(40.015,-37.349) X1_A1.2 ; v1(40.276,-20.749) C8_A2.1 ; v1(40.315,-34.275) C8_A1.1 ; C7_A2.1 40.476,-14.749 40.176,-14.449 40.176,-13.849 ; C11_A2.1 40.476,-13.249 40.176,-13.549 40.176,-13.849 ; C7_A1.1 40.515,-28.275 40.215,-27.975 40.215,-27.374 ; C11_A1.1 40.515,-26.775 40.215,-27.075 40.215,-27.374
  Top w0.3: U8.7 0.9,-34.2 0.7,-34 0.7,-33.7 0.85,-33.55 U8.8 ; R8.2 v1(7.6,-21.6) 8.875,-21.6 C3.2 9.245,-21.23 U1.2 ; C4.1 15.7,-35.75 v1(15.7,-36.9) ; v1(17.4,-34.6) U3.1 ; U3.8 v1(17.4,-28) ; C1.2 25.55,-33.525 v1(25.675,-33.4) ; C6.2 v1(25.675,-33.4) ; C5.1 v1(25.675,-33.4)
  other v1: -12.775,-34.45 -12.775,-24.7
NetC5_2: C5.2 R1.2 U2.1 | length 3.9
  Top w0.15: U2.1 23.925,-28.825 R1.2 C5.2
NetC6_1: C6.1 R2.1 U4.1 | length 4.1
  Top w0.15: U4.1 23.525,-35.525 C6.1 R2.1
NetC10_A1_1: C10_A1.1 R5_A1.1 U5_A1.5 | length 4.8
  Top w0.15: U5_A1.5 40.315,-31.14 ; R5_A1.1 41.105,-31.14 40.315,-31.14 ; C10_A1.1 40.615,-29.774 40.315,-30.074 40.315,-31.14
NetC10_A1_2: C10_A1.2 R4_A1.2 R5_A1.2 U5_A1.6 | length 16.4
  Top w0.15: v1(36.555,-29.87) U5_A1.6 ; R4_A1.2 43.715,-32.775 44.16,-32.33 44.16,-31.274 ; R5_A1.2 44.16,-31.274 ; C10_A1.2 42.885,-29.87 v1(44.16,-29.87) 44.16,-31.274
  Bottom w0.15: v1(36.555,-29.87) v1(44.16,-29.87)
NetC10_A2_1: C10_A2.1 R5_A2.1 U5_A2.5 | length 4.8
  Top w0.15: U5_A2.5 40.276,-17.614 ; R5_A2.1 41.066,-17.614 40.276,-17.614 ; C10_A2.1 40.576,-16.249 40.276,-16.549 40.276,-17.614
NetC10_A2_2: C10_A2.2 R4_A2.2 R5_A2.2 U5_A2.6 | length 16.4
  Top w0.15: v1(36.516,-16.344) U5_A2.6 ; R4_A2.2 43.676,-19.249 44.121,-18.804 44.121,-17.749 ; R5_A2.2 44.121,-17.749 ; C10_A2.2 42.846,-16.344 v1(44.121,-16.344) 44.121,-17.749
  Bottom w0.15: v1(36.516,-16.344) v1(44.121,-16.344)
NetC11_A1_2: C11_A1.2 U5_A1.9 | length 18.2
  Top w0.15: U5_A1.9 33.285,-27.33 34.94,-25.675 44.215,-25.675 44.515,-25.974 44.515,-26.375 44.115,-26.775 C11_A1.2
NetC11_A2_2: C11_A2.2 U5_A2.9 | length 18.2
  Top w0.15: U5_A2.9 33.246,-13.804 34.901,-12.149 44.176,-12.149 44.476,-12.449 44.476,-12.849 44.076,-13.249 C11_A2.2
NetC11_D1_1: C11_D1.1 R5_D1.2 | length 5.3
  Top w0.15: R5_D1.2 -6.4,-28.125 -5.475,-27.2 -5.475,-26.1 -6.45,-25.125 C11_D1.1
NetC11_D2_1: C11_D2.1 R5_D2.2 | length 5.3
  Top w0.15: R5_D2.2 -6.4,-37.875 -5.475,-36.95 -5.475,-35.85 -6.45,-34.875 C11_D2.1
NetC13_D1_1: C13_D1.1 R6_D1.2 U6_D1.19 | length 9.1
  Top w0.15: C13_D1.1 R6_D1.2 -22.4,-26.125 -22.675,-26.4 -22.675,-26.7 -22.4,-26.975 U6_D1.19
NetC13_D2_1: C13_D2.1 R6_D2.2 U6_D2.19 | length 9.1
  Top w0.15: C13_D2.1 R6_D2.2 -22.4,-35.875 -22.675,-36.15 -22.675,-36.45 -22.4,-36.725 U6_D2.19
NetR5_D1_1: R5_D1.1 R7_D1.2 U6_D1.2 | length 4.9
  Top w0.15: U6_D1.2 -9.825,-26.975 ; R5_D1.1@-8.775,-28.125 -9.475,-28.125 -9.825,-27.775 -9.825,-26.975 ; R7_D1.2@-8.75,-26.65 -8.775,-26.625 -9.475,-26.625 -9.825,-26.975
NetR5_D2_1: R5_D2.1 R7_D2.2 U6_D2.2 | length 4.9
  Top w0.15: U6_D2.2 -9.825,-36.725 ; R5_D2.1@-8.775,-37.875 -9.475,-37.875 -9.825,-37.525 -9.825,-36.725 ; R7_D2.2@-8.75,-36.4 -8.775,-36.375 -9.475,-36.375 -9.825,-36.725
NetR6_D1_1: R6_D1.1 U6_D1.18 | length 2.7
  Top w0.15: R6_D1.1 -18.95,-26.125 -18.775,-26.3 -17.1,-26.3 U6_D1.18
NetR6_D2_1: R6_D2.1 U6_D2.18 | length 2.7
  Top w0.15: R6_D2.1 -18.95,-35.875 -18.775,-36.05 -17.1,-36.05 U6_D2.18
NetR7_D1_1: R7_D1.1 U6_D1.3 | length 9.8
  Top w0.15: v1(-12.975,-26.325) U6_D1.3 ; R7_D1.1 -6.1,-26.625 v1(-5.975,-26.625)
  Bottom w0.15: v1(-12.975,-26.325) -8.65,-26.325 -8.35,-26.625 v1(-5.975,-26.625)
NetR7_D2_1: R7_D2.1 U6_D2.3 | length 9.8
  Top w0.15: v1(-12.975,-36.075) U6_D2.3 ; R7_D2.1 -6.1,-36.375 v1(-5.975,-36.375)
  Bottom w0.15: v1(-12.975,-36.075) -8.65,-36.075 -8.35,-36.375 v1(-5.975,-36.375)
NetR8_1: R8.1 U7.6 | length 4.8
  Top w0.15: U7.6 3.175,-18.85 3.6,-19.275 3.6,-21.375 3.825,-21.6 R8.1
NetR9_2: R9.2 U8.6 | length 2.7
  Top w0.15: U8.6 3.8,-34.85 R9.2
NetR10_2: R10.2 U8.2 U8.4 U8.5 | length 8.6
  Top w0.15: U8.4 0.675,-36.15 0.625,-36.1 ; U8.5 0.875,-35.5 0.625,-35.75 0.625,-36.1 ; R10.2 4.4,-37.45 U8.2 1.025,-37.45 0.625,-37.05 0.625,-36.1
NetR11_2: R11.2 U9.6 | length 3.2
  Top w0.15: U9.6 3.075,-26.775 3.325,-27.025 3.325,-27.525 3.825,-28.025 R11.2
NetU5_A1_2: U5_A1.2 X1_A1.3 | length 3
  Top w0.15: U5_A1.2 40.115,-34.95 X1_A1.3
NetU5_A2_2: U5_A2.2 X1_A2.3 | length 3
  Top w0.15: U5_A2.2 40.076,-21.424 X1_A2.3
NetU6_D1_1: U6_D1.1 U6_D1.4 | length 6
  Top w0.15: U6_D1.1 -13.25,-27.625 -13.875,-27 -13.875,-26.3 -13.25,-25.675 U6_D1.4
NetU6_D1_8: U6_D1.8 X2_D1.3 | length 7.1
  Top w0.15: U6_D1.8 -12.475,-23.075 -12.875,-22.675 -12.875,-21.375 -12.425,-20.925 X2_D1.3
NetU6_D2_1: U6_D2.1 U6_D2.4 | length 6
  Top w0.15: U6_D2.1 -13.25,-37.375 -13.875,-36.75 -13.875,-36.05 -13.25,-35.425 U6_D2.4
NetU6_D2_8: U6_D2.8 X2_D2.3 | length 7.1
  Top w0.15: U6_D2.8 -12.475,-32.825 -12.875,-32.425 -12.875,-31.125 -12.425,-30.675 X2_D2.3
NetU7_3: U7.3 U9.3 | length 11.4
  Top w0.15: v1(0.6,-26.9) 0.6,-25.7 3.15,-23.15 3.15,-20.95 3,-20.8 U7.3 ; v1(0.625,-28.725) U9.3
  Bottom w0.15: v1(0.6,-26.9) 0.6,-27 0.625,-27.025 v1(0.625,-28.725)
NetU7_4: U7.4 U8.3 | length 24.7
  Top w0.15: v1@0.55,-20.15 v1(0.5,-20.2) 2.075,-20.2 U7.4 ; U8.3 3.325,-36.8 v1(3.525,-36.6)
  Bottom w0.15: v1(0.5,-20.2) 0.125,-20.575 0.125,-24.125 4.7,-28.7 6,-28.7 6.554,-29.254 6.9,-29.6 6.9,-33.225 v1(3.525,-36.6)
NetU7_5: U7.5 U7.14 | length 6.1
  Top w0.15: U7.14 -1.3,-20.8 0,-19.5 U7.5
NetU9_5: U9.5 U9.14 U9.15 | length 8.4
  Top w0.15: U9.15 -1.975,-29.375 -1.65,-29.05 -1.65,-28.725 ; U9.14 -1.65,-28.725 ; U9.5 -0.35,-27.425 -1.65,-28.725
RESET: U1.12 U3.7 U3.15 | length 22.3
  Top w0.15: U3.15 13.45,-32.95 14.3,-32.1 14.3,-30.5 15.1,-29.7 U3.7 18.5,-29.7 18.8,-29.4 v1(18.8,-28.1) ; v1(22.9,-24.2) 22.945,-24.245 U1.12
  Bottom w0.15: v1(18.8,-28.1) 18.8,-23.4 19.4,-22.8 21.5,-22.8 v1(22.9,-24.2)
RX1: U7.2 | length 9.8
  Top w0.15: v1(0.3,-17.8) 0.3,-14 ; v1(0.7,-21.4) 0.75,-21.45 U7.2
  Bottom w0.15: v1(0.3,-17.8) 0.3,-19.2 1.4,-20.3 1.4,-21 1,-21.4 v1(0.7,-21.4)
RX2: U7.1 | length 10.9
  Top w0.15: v1(0.625,-22.1) U7.1 ; v1(0.9,-18.5) 0.9,-14
  Bottom w0.15: v1(0.625,-22.1) 1.3,-22.1 1.9,-21.5 1.9,-20.3 0.9,-19.3 v1(0.9,-18.5)
SWC0: U9.10 | length 17.2
  Top w0.15: U9.10 v1(-1.2,-26.125) -0.3,-25.225 -0.3,-24.7 1,-23.4 v1(1,-23.2)
  Bottom w0.15: v1(1,-23.2) 1.6,-23.2 3.432,-21.368 3.432,-19.368 5.8,-17 5.8,-14.5
SWC1: U9.11 | length 18
  Top w0.15: U9.11 v1(-1.85,-26.775) -0.475,-26.775 0.2,-26.1 0.2,-25.1 v1(1.5,-23.8)
  Bottom w0.15: v1(1.5,-23.8) 3.732,-21.568 3.732,-19.568 6.1,-17.2 6.1,-16.2 6.1,-14.5
SWC2: U8.9 | length 32.2
  Top w0.15: U8.9 v1(-1.325,-33.55) ; v1(4.037,-23.563) 4.11,-23.636 4.464,-23.636 4.927,-24.1 7.6,-24.1 8.176,-24.676 8.176,-28.976 7.551,-29.6 v1(5.5,-29.6)
  Bottom w0.15: v1(-1.325,-33.55) 1.25,-33.55 5.2,-29.6 ; v1(4.037,-23.563) 4.032,-23.558 4.032,-19.72 6.4,-17.351 6.4,-14.5
SWC3: U8.10 | length 32.7
  Top w0.15: U8.10 v1(-1.975,-34.2) ; v1(4.532,-23.068) 5.264,-23.8 7.724,-23.8 8.476,-24.551 8.476,-29.1 7.076,-30.5 6.407,-30.5 6.307,-30.4 5.6,-30.4 v1(5.5,-30.5)
  Bottom w0.15: v1(-1.975,-34.2) 1.8,-34.2 v1(5.5,-30.5) ; v1(4.532,-23.068) 4.527,-23.063 4.527,-19.649 6.7,-17.476 6.7,-14.5
SWC4: U8.11 | length 33.7
  Top w0.15: U8.11 v1(-1.325,-34.85) ; v1(5.027,-22.573) 5.1,-22.646 5.1,-23 5.6,-23.5 7.849,-23.5 8.776,-24.427 8.776,-29.224 7.1,-30.9 v1(6.1,-30.9)
  Bottom w0.15: v1(-1.325,-34.85) 3.35,-34.85 5.4,-32.8 5.4,-31.6 v1(6.1,-30.9) ; v1(5.027,-22.573) 5.027,-19.573 7,-17.6 7,-14.5
SWC5: U7.9 U9.9 | length 25.9
  Top w0.15: U9.9 v1(-1.85,-25.475) -1.85,-22.25 v1(-0.5,-20.9) ; U7.9 -3.425,-17.5 v1(-2.1,-17.5) ; v1(4.5,-15.5) 7.4,-15.5 v1(7.6,-15.3)
  Bottom w0.15: v1@-0.493,-20.9 v1(-0.5,-20.9) -1.932,-20.9 -2.475,-20.357 -2.475,-20.325 -3.2,-19.6 -3.2,-18 -2.7,-17.5 v1(-2.1,-17.5) -1.7,-17.5 -0.5,-16.3 3.7,-16.3 v1(4.5,-15.5) ; 7.3,-14.5 7.3,-14.9 7.6,-15.2 v1(7.6,-15.3)
SWC6: U7.10 | length 14.7
  Top w0.15: U7.10 v1(-1.325,-18.2) ; v1(4.7,-16.2) 7.9,-16.2 v1(8.25,-15.85)
  Bottom w0.15: v1(-1.325,-18.2) -1.325,-17.725 -0.2,-16.6 4.4,-16.6 4.7,-16.3 v1(4.7,-16.2) ; 7.6,-14.5 8.25,-15.15 v1(8.25,-15.85)
SWC7: U7.11 | length 15.7
  Top w0.15: U7.11 v1(-1.975,-18.85) ; v1(4.5,-17.2) 4.7,-17.2 5.3,-16.6 8.4,-16.6 8.9,-16.1 v1(8.9,-15.3)
  Bottom w0.15: v1(-1.975,-18.85) -1.05,-18.85 -0.5,-18.3 -0.5,-17.5 -0.2,-17.2 v1(4.5,-17.2) ; 8.087,-14.474 8.7,-15.087 8.7,-15.1
TONE_ON: U1.11 U2.3 | length 4
  Top w0.15: U2.3 19.95,-28.175 20.3,-27.825 21.4,-27.825 21.675,-27.55 U1.11
TX1: U7.12 | length 8.1
  Top w0.15: U7.12 v1(-1.325,-19.5) ; v1@-1.1,-19.5 v1(-1.325,-19.5) ; -0.7,-14 -0.7,-18.875 v1(-1.325,-19.5)
TX2: U7.13 | length 8.8
  Top w0.15: U7.13 v1(-1.975,-20.15) -1.825,-20 -1.118,-20 -0.3,-19.182 -0.3,-14
VCC: C1.1 C3.1 C4.2 C7_A1.2 C7_A2.2 C8_A1.2 C8_A2.2 C12_D1.2 C12_D2.2 C13_D1.2 C13_D2.2 C14_D1.2 C14_D2.2 C15.2 C16.2 C17.2 U1.1 U1.28 U2.4 U3.16 U4.3 U4.4 U5_A1.10 U5_A1.12 U5_A1.16 U5_A2.10 U5_A2.12 U5_A2.16 U6_D1.11 U6_D1.20 U6_D2.11 U6_D2.20 U7.16 U8.16 U9.16 X1_A1.1 X1_A1.4 X1_A2.1 X1_A2.4 X2_D1.1 X2_D1.4 X2_D2.1 X2_D2.4 | length 81
  Top w0.15: C13_D2.2 -18.7,-34.375 -18.475,-34.15 -18.475,-32.85 ; C14_D2.2 -18.5,-32.875 -18.475,-32.85 ; C13_D1.2 -18.7,-24.625 -18.475,-24.4 -18.475,-23.1 ; C14_D1.2 -18.5,-23.125 -18.475,-23.1 ; U6_D2.20 -15.6,-37.375 v1(-15.575,-37.35) ; U6_D2.11 -17.1,-31.55 v1(-18.475,-31.55) -18.475,-32.85 ; U6_D1.20 -15.6,-27.625 v1(-15.575,-27.6) ; U6_D1.11 -17.1,-21.8 v1(-18.475,-21.8) -18.475,-23.1 ; C12_D2.2 v1@-5.775,-33.375 ; C12_D1.2 v1@-5.775,-23.625 ; X2_D2.4 X2_D2.1 -6.3,-32.075 -5.775,-32.6 v1@-5.775,-33.375 ; X2_D1.4 X2_D1.1 -6.3,-22.325 -5.775,-22.85 v1@-5.775,-23.625 ; v1(-5.75,-33.35) v1@-5.775,-33.375 ; v1(-5.75,-23.6) v1@-5.775,-23.625 ; U9.16 v1(-1.975,-30.025) ; C17.2 6.1,-32.625 v1(6.125,-32.6) ; C16.2 v1(7.325,-26.525) ; v1(14.01,-14.6) U1.28@14.01,-12.545 ; U5_A2.16 v1(31.436,-22.694) ; U5_A2.12 v1(31.436,-17.614) ; U5_A2.10 v1(31.436,-15.074) ; U5_A1.16 v1(31.475,-36.22) ; U5_A1.12 v1(31.475,-31.14) ; U5_A1.10 v1(31.475,-28.6) ; C8_A2.2 43.976,-20.749 44.476,-21.249 v1(44.476,-21.749) 44.476,-21.924 43.976,-22.424 X1_A2.4 X1_A2.1 X1_A2.1@42.951,-23.749 ; C7_A2.2 v1(44.176,-14.749) ; C8_A1.2 44.015,-34.275 44.515,-34.774 v1(44.515,-35.275) 44.515,-35.449 44.015,-35.949 X1_A1.4 X1_A1.1 X1_A1.1@42.99,-37.274 ; C7_A1.2 v1(44.215,-28.275)
  Top w0.3: v1(-3.6,-23.1) -3.475,-22.975 U7.16 ; U8.16 v1(-1.975,-38.1) ; C15.2 6.3,-20 v1(7.6,-20) 8.925,-20 C3.1 ; C3.1@9.075,-19.8 C3.1 ; U1.1 9.235,-19.96 C3.1 ; U3.16 13.2,-33.6 14.125,-34.525 C4.2 14.125,-36.875 v1(14.1,-36.9) ; v1(19.3,-32.6) 20.225,-33.525 C1.1 ; U4.4 U4.3 19.9,-35.475 19.9,-34.3 20.325,-33.875 C1.1 ; U2.4 19.95,-32.15 20.4,-32.6 20.4,-33.45 C1.1
pads on no net: U1.13 U1.15 U1.16 U1.17 U1.18 U1.19 U1.29 U1.30 U1.31 U1.32 U5_A1.1 U5_A1.15 U5_A2.1 U5_A2.15 U6_D1.7 U6_D1.9 U6_D1.16 U6_D2.7 U6_D2.9 U6_D2.16

## Polygon pours and split planes (outlines as drawn)
VCC on VCC (split plane): 46.214,-39.29 -22.765,-39.29 -22.765,9.69 46.214,9.69
GND on GND (split plane): 46.214,-39.29 -22.765,-39.29 -22.765,9.69 46.214,9.69

## Silkscreen, mask and mechanical layers (free items; w line width, h text height)
Mechanical 1:
  lines w0.05: -212.912,-191.651 -189.544,-191.651 ; -212.912,-190.781 -189.544,-190.781 ; -188.32,-196.079 -214.136,-196.079 cw(c-214.136,-195.779) -214.436,-195.779 -214.436,-189.775 cw(c-214.136,-189.775) -214.136,-189.475 -188.32,-189.475
  text "Layer Stack Up Detail for: COMSXXXX_Comms_Board_Miniaturization.PcbDoc" at -212.912,-190.383 h1
  text "Layer" at -212.912,-191.106 h1
  text "Name" at -212.912,-191.506 h1
  text "Top Layer" at -212.912,-192.295 h1
  text "VCC" at -212.912,-193.121 h1
  text "Internal Plane 1" at -212.912,-193.946 h1
  text "Bottom Layer" at -212.912,-194.772 h1